# Altium PCB CFS210017030ZZP2005A0.PcbDoc
Units mil, origin at the board's own origin, x right, y up, seen from the top; angles counter-clockwise.
Board outline 1651.73 x 737.32 mil, 4 copper layers (Top Layer, GND, VCC, Bottom Layer); 92 components, 60 nets, 274 pads, 86 vias.
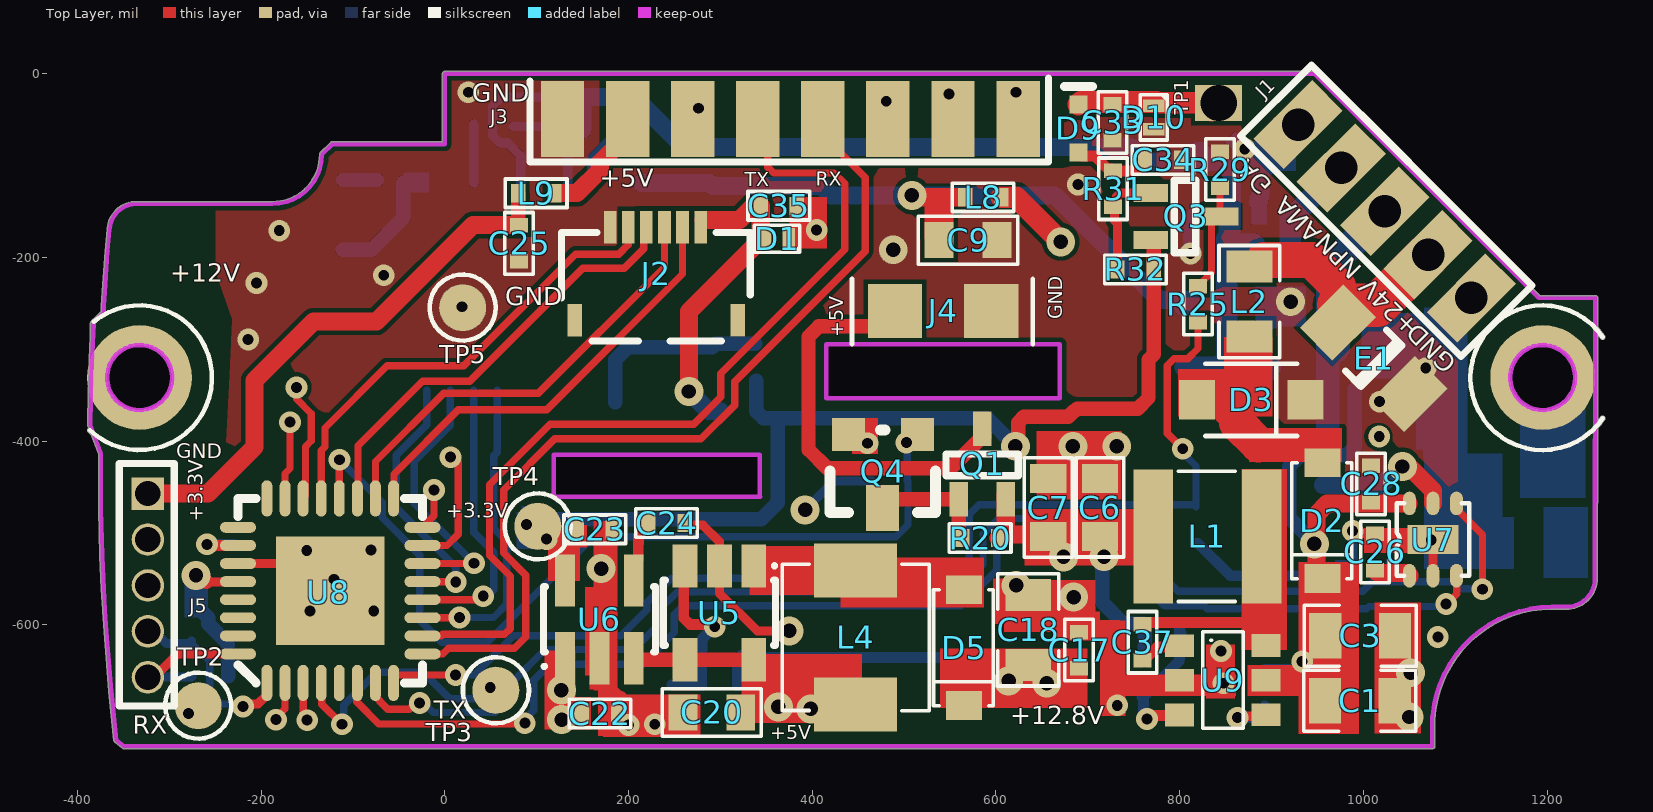
[diagram p0: Top Layer view]
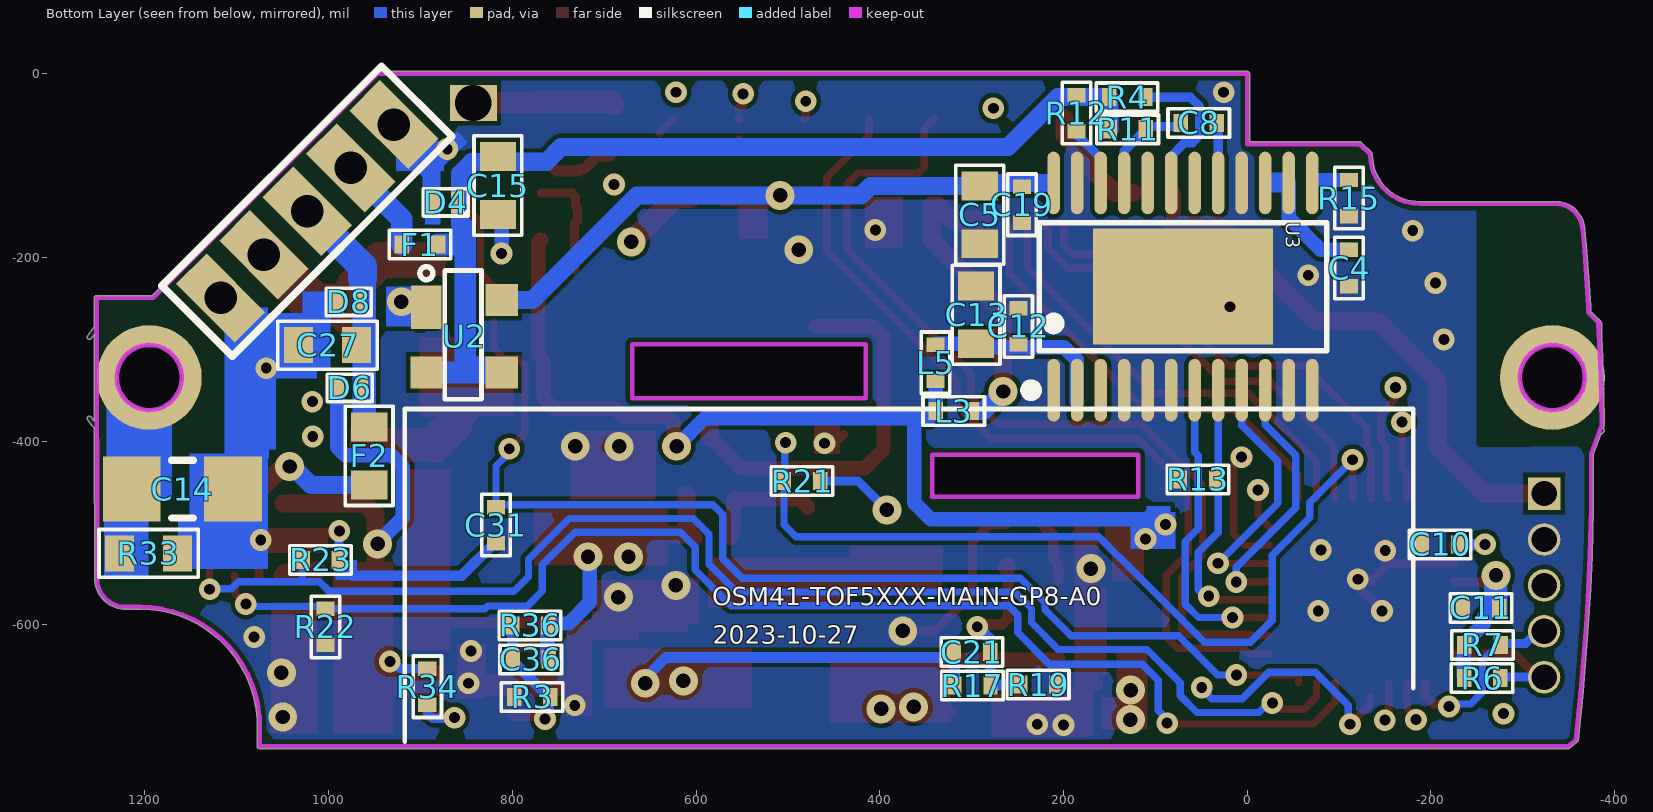
[diagram p1: Bottom Layer view, seen from below]
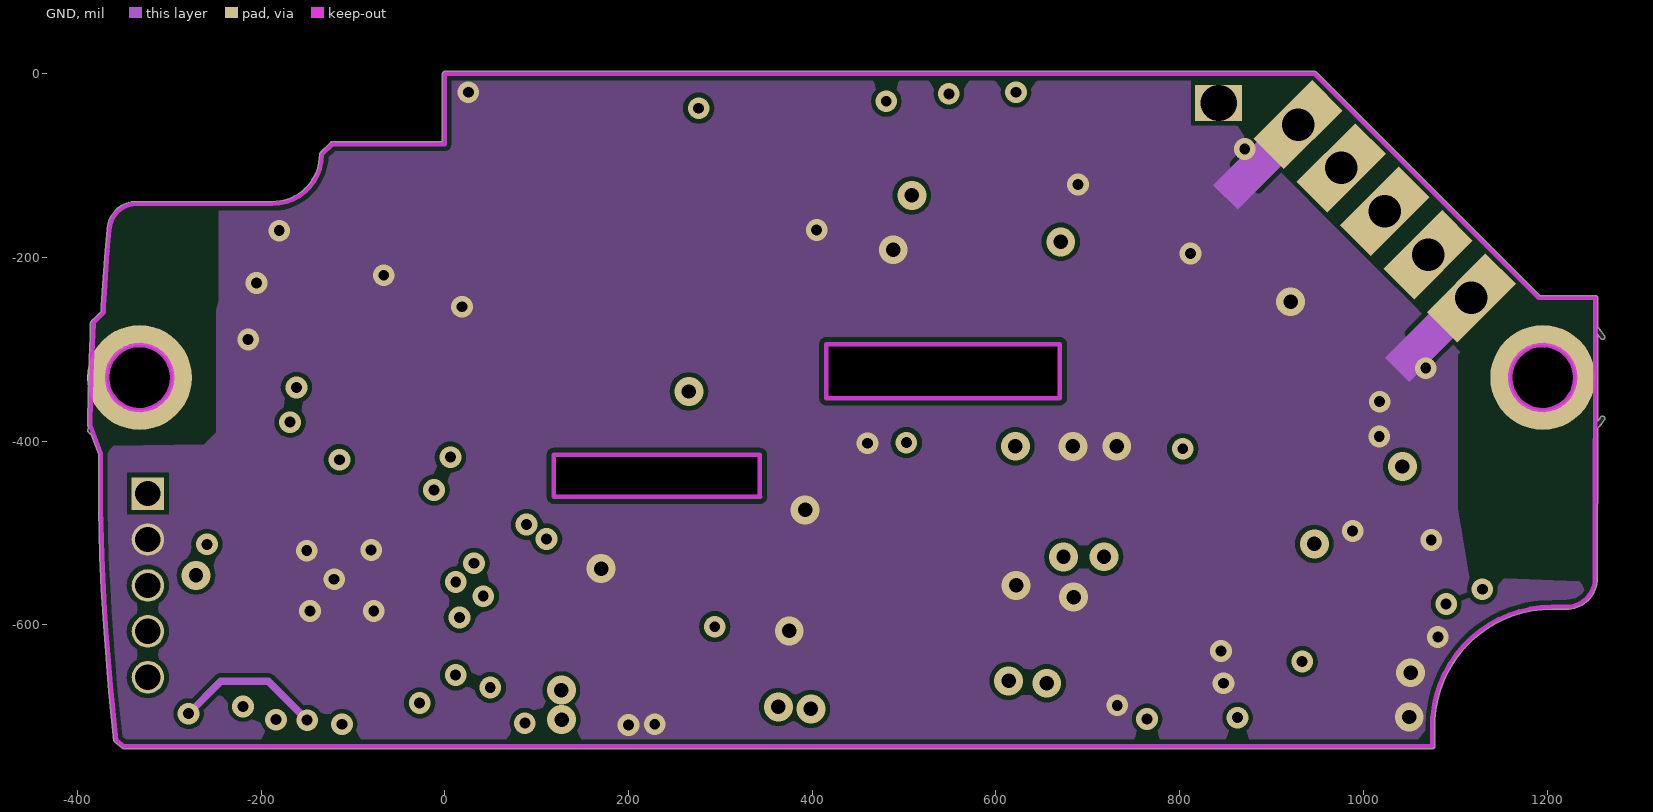
[diagram p2: GND]
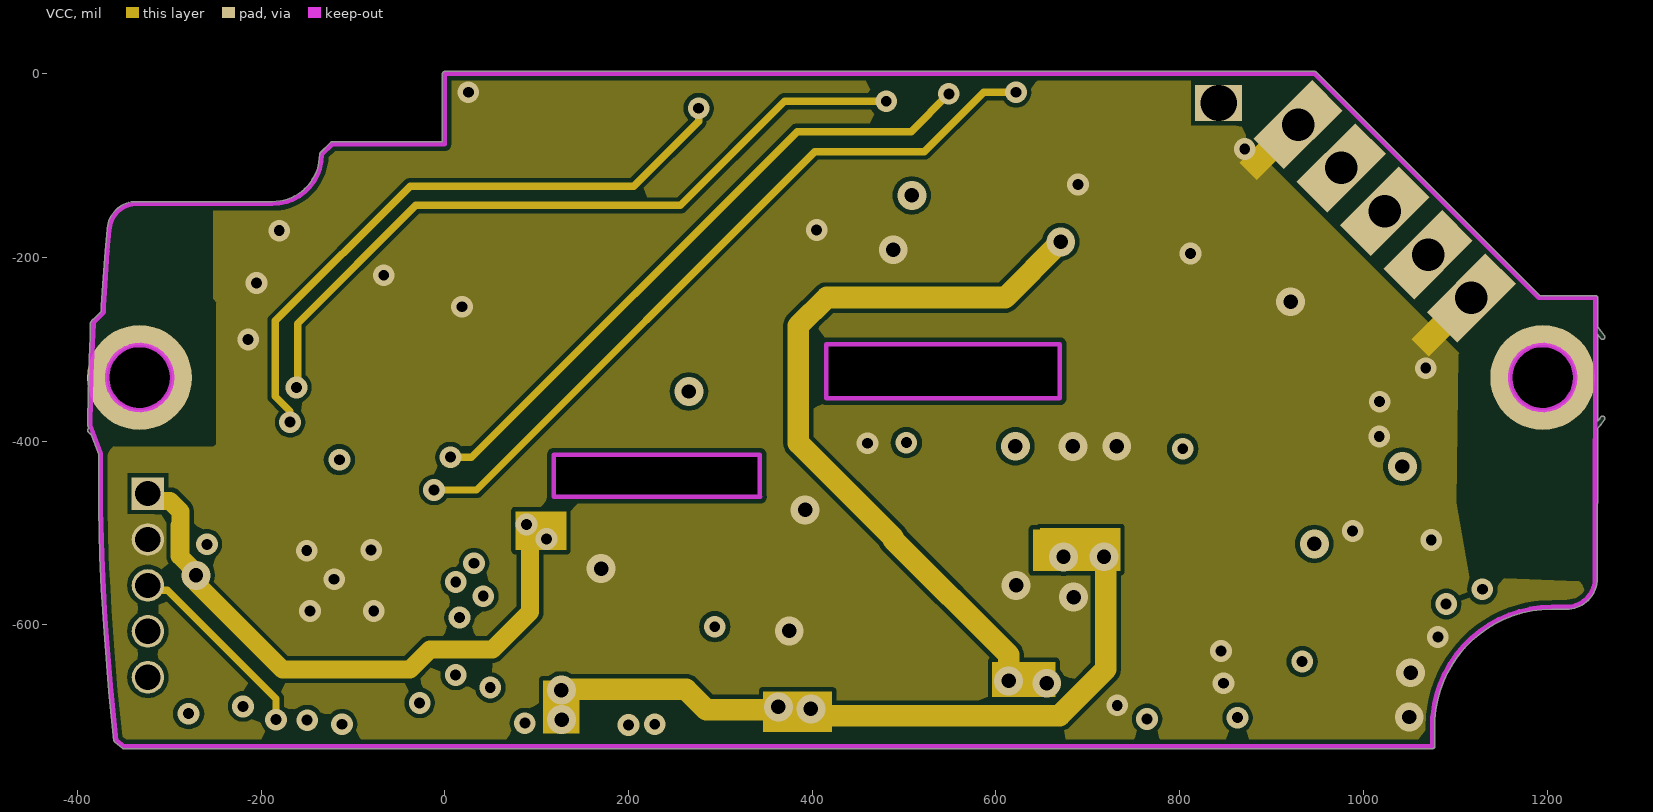
[diagram p3: VCC]
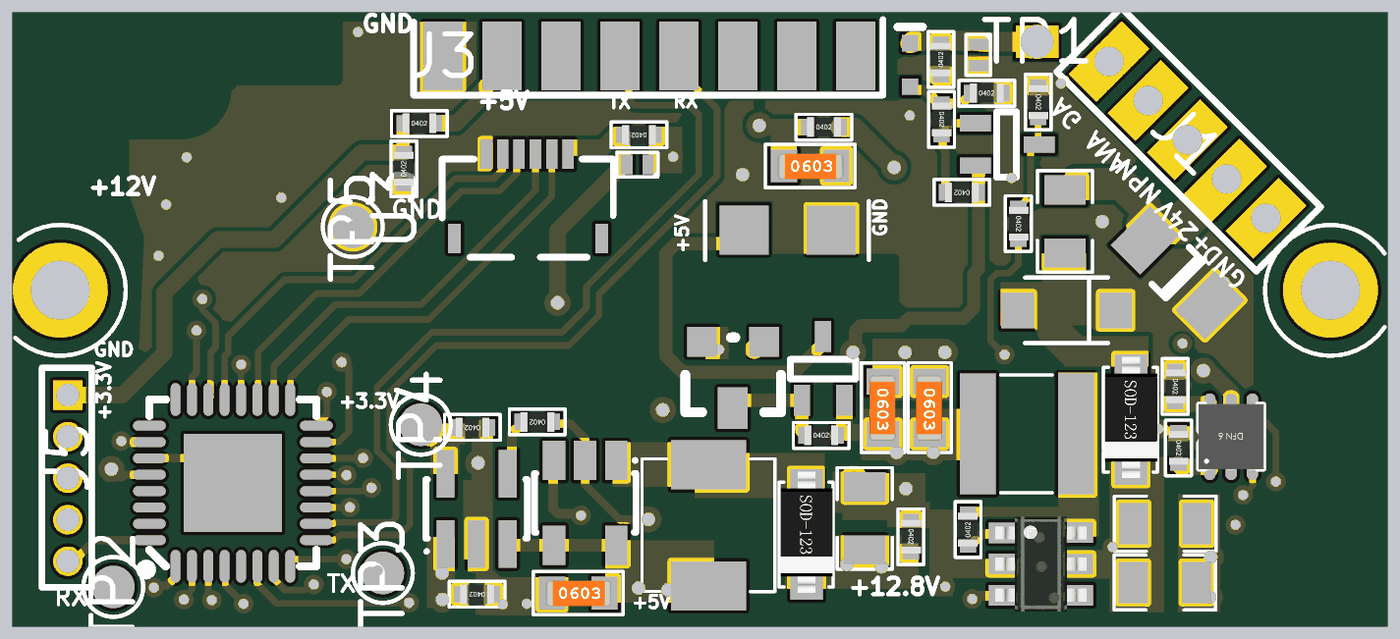
[diagram p4: 3D render of the assembled board from above, using the file's embedded part models]
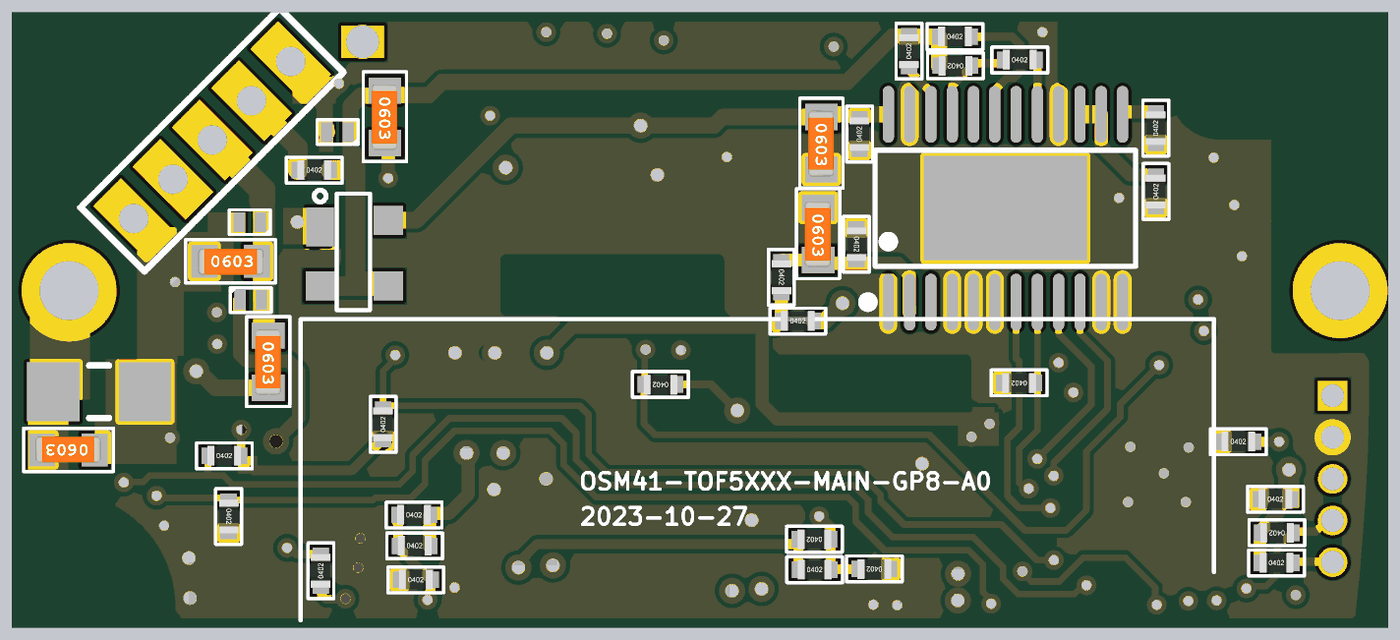
[diagram p5: 3D render of the assembled board from below, using the file's embedded part models]

## Layer stack, top to bottom
Top Solder: solder mask 0.4, Solder Resist, Dk 3.5
Top Layer: signal copper 1.4
Dielectric1: core 12.6, FR-4, Dk 4.8
GND: signal copper 1.4
Dielectric2: prepreg 12.6, FR-4, Dk 4.8
VCC: signal copper 1.4
Dielectric3: core 12.6, FR-4, Dk 4.8
Bottom Layer: signal copper 1.4
Bottom Solder: solder mask 0.4, Solder Resist, Dk 3.5

## Board outline
-375.65,-524.89 cw(c-373.13,-524.78) -375.65,-524.85 -375.65,-524.84 -376.92,-474.3 -376.92,-474.29 ccw(c-374.4,-474.23) -376.92,-474.3 -376.92,-474.29 cw(c-374.4,-474.23) -376.92,-474.23 -376.86,-414.24 -384.8,-392.87 cw(c-332.22,-330.92) -387.98,-390.02 cw(c-386.26,-388.19) -387.38,-385.94 -388.15,-383.87 cw(c-386.23,-382.25) -388.74,-382.22 cw(c2338.13,-420.35) -388.73,-381.8 cw(c2338.13,-420.35) -388.29,-357.94 cw(c-385.78,-357.99) -388.29,-357.92 cw(c2338.13,-420.35) -387.64,-334.07 cw(c-385.13,-334.13) -387.64,-334.06 cw(c-385.13,-334.13) -387.64,-334.04 cw(c2338.13,-420.35) -386.78,-310.2 cw(c-384.27,-310.29) -386.78,-310.19 cw(c-384.27,-310.29) -386.78,-310.18 cw(c2338.13,-420.35) -385.72,-286.39 -385.72,-271.59 cw(c-383.2,-271.59) -384.98,-269.81 -384.74,-269.57 cw(c-382.3,-270.16) -383.89,-268.22 cw(c-332.22,-330.92) -381.44,-266.27 -373.79,-258.62 -373.79,-253.23 cw(c-371.27,-253.23) -373.78,-253.07 -373.78,-253.06 -372.31,-229.44 cw(c-369.8,-229.59) -372.31,-229.42 -372.31,-229.43 cw(c-369.8,-229.59) -372.31,-229.4 -369.72,-193.09 cw(c-367.21,-193.25) -369.72,-193.03 -369.72,-193.01 -367.61,-169.26 cw(c-365.1,-169.48) -367.44,-168.55 cw(c-364.93,-168.38) -367.43,-168.14 cw(c-335.53,-171.12) -335.53,-139.08 cw(c-335.53,-141.59) -334.67,-139.23 -187.73,-139.23 ccw(c-187.73,-87.74) -136.24,-87.74 cw(c-133.73,-87.74) -135.51,-85.96 -124.4,-74.85 cw(c-122.62,-76.63) -122.62,-74.11 -2.52,-74.11 -2.52,0 cw(c0,0) 0,2.51 947,2.51 cw(c947,0) 948.78,1.78 1192.08,-241.53 1252.76,-241.53 cw(c1252.76,-244.04) 1255.27,-244.04 cw(c1252.76,-244.04) 1255.27,-244.05 1255.21,-275.99 cw(c1195.34,-330.92) 1262.52,-285.22 cw(c1260.44,-286.63) 1262.96,-286.63 cw(c1260.44,-286.63) 1258.36,-288.05 ccw(c1195.34,-330.92) 1255.19,-283.72 1255,-378.37 ccw(c1195.34,-330.92) 1258.36,-373.8 cw(c1260.44,-375.21) 1262.96,-375.21 cw(c1260.44,-375.21) 1262.52,-376.63 cw(c1195.34,-330.92) 1254.98,-386.11 1254.65,-549.58 cw(c1221.25,-549.57) 1221.26,-582.97 1221.25,-582.97 ccw(c1221.25,-549.57) 1221.26,-582.97 1221.25,-582.97 1205.52,-582.97 cw(c1205.04,-580.5) 1205.04,-583.01 ccw(c1205.04,-710.42) 1077.86,-702.72 1077.81,-732.3 ccw(c1075.3,-732.29) 1077.81,-732.29 1077.81,-732.3 cw(c1075.3,-732.29) 1075.3,-734.81 -349.39,-734.81 cw(c-349.39,-732.29) -350.97,-734.25 -350.96,-734.25 cw(c-349.39,-732.29) -350.97,-734.24 -350.97,-734.25 -350.97,-734.24 -359.18,-727.61 cw(c-357.6,-725.65) -359.19,-727.61 -359.18,-727.61 cw(c-357.6,-725.65) -360.1,-725.92 -365.77,-672.47 cw(c-363.27,-672.2) -365.78,-672.4 -370.84,-607.9 cw(c-368.33,-607.7) -370.84,-607.87 -372.48,-584.31 cw(c-369.97,-584.13) -372.48,-584.28 -372.48,-584.29 cw(c-369.97,-584.13) -372.48,-584.28 -373.91,-560.71 cw(c-371.4,-560.55) -373.91,-560.69 -373.91,-560.7 cw(c-371.4,-560.55) -373.91,-560.68 -375.13,-537.08 cw(c-372.61,-536.95) -375.13,-537.05 -375.13,-537.06 cw(c-372.61,-536.95) -375.13,-537.05
cut-out: 118.7,-461.63 342.61,-461.63 342.61,-414.75 118.7,-414.75
cut-out: 669.68,-353.39 415.41,-353.39 415.41,-294.34 669.68,-294.34

## Design rules (kind name [scope] priority, off if disabled: settings)
Clearance [InPoly] p1: gap=5
ComponentClearance [(InComponent('J2'))] p1: gap=3.94 collisioncheckmode=3 verticalgap=3.94 showdistances=FALSE
ComponentClearance ComponentClearance_1 [All] p2: gap=0.04 collisioncheckmode=3 verticalgap=0.04 showdistances=FALSE
FabricationTestPointUsage TestPointUsage [All] p1: valid=0 allowmultiple=FALSE
FabricationTestpoint Testpoint [(IsPad And (OnTopLayer Or OnBottomLayer))] p1: side=3 testpointundercomponent=TRUE minsize=40 maxsize=100 preferedsize=60 minholesize=0 maxholesize=40 preferedholesize=32 testpointgrid=1 allowsidetop=TRUE allowsidebottom=TRUE usegrid=TRUE gridtolerance=0.01
HoleToHoleClearance [All] p1: gap=5.98 allowstackedmicrovias=TRUE
MinimumSolderMaskSliver [All] p1: minsoldermaskwidth=5.98
PlaneConnect [All] p1: planeconnectstyle=Direct reliefexpansion=20 reliefentries=4 reliefconductorwidth=10 reliefairgap=10
PolygonConnect PolygonConnect_1 [ISVIA] p1: connectstyle=Direct reliefconductorwidth=10 reliefentries=4 polygonreliefangle="90 Angle" airgapwidth=10
PolygonConnect [All] p2: connectstyle=Direct reliefconductorwidth=10 reliefentries=4 polygonreliefangle="90 Angle" airgapwidth=10
RoutingVias [All] p1: holewidth=11.81 width=31.5 viastyle="Through Hole" minholewidth=6 minwidth=10 maxholewidth=39.37 maxwidth=50
SilkToSilkClearance [All] p1: silktosilkclearance=5.98
SilkToSolderMaskClearance SilkscreenOverComponentPads [IsPad] p1: minsilkscreentomaskgap=10 clearancetoexposedcopper=TRUE
SolderMaskExpansion [All] p1: expansion=4
Width [All] p1: maxlimit=78.74 minlimit=5 preferedwidth=9.84
22 further rules are at their usual default settings.

## Components (designator, comment, footprint, x,y, rotation, side; value= is the part's Value field where it differs from the comment)
C1 "Q0402C50V223K01" R0805-Z 996.16,-682.57 r180 top
C3 "Q0402C50V223K01" R0805-Z 996.63,-611.79 r180 top
C4 "0.1UF" R0402-Z -110.92,-211.52 r90 bottom
C5 "25V 10uF 20% X5R 0603" R0603-Z 291.16,-153.58 r90 bottom
C6 "Q0603C16V106K01" R0603-Z 713.32,-472.21 r90 top
C7 "Q0402C50V223K01" R0603-Z 657.06,-472.29 r90 top
C8 "3.9NF/50V/10%" R0402-Z 52.76,-53.44 r180 bottom
C9 "2.2uF,0603,50v" R0603-Z 569.7,-181.15 r180 top
C10 "Cap Semi" R0402-Z -209.92,-512.33 r180 bottom
C11 "Cap Semi" R0402-Z -254.46,-581.47 r180 bottom
C12 "X7R 0402 100N 10% 25V" R0402-Z 249.2,-275.04 r270 bottom
C13 "16V 10uF 20% X5R 0603" R0603-Z 295.1,-262.45 r90 bottom
C14 "1nF 2KV" CR3216-1206 1159.28,-452.22 r0 bottom
C15 "1uF/50V 0603" R0603-Z 815.75,-121.78 r90 bottom
C17 "Q0402C50V223K01" R0402-Z 690.69,-627.52 r270 top
C18 "10uF,0805,50v" R0805-Z 635.25,-605.55 r90 top
C19 "X7R 0402 100N 10% 25V" R0402-Z 245.38,-142.56 r90 bottom
C20 "Q0402C50V223K01" R0603-Z 290.71,-695.27 r180 top
C21 "150PF/50V //330PF" R0402-Z 299.7,-629.52 r0 bottom
C22 "Q0402C50V223K01" R0402-Z 168.98,-696.69 r180 top
C23 "Q0402C50V223K01" R0402-Z 163.31,-495.96 r180 top
C24 "Q0402C50V223K01" R0402-Z 241.44,-489.26 r180 top
C25 "Cap Semi" R0402-Z 80.93,-184.55 r90 top
C26 "100nF/10V,0402" R0402-Z 1012.59,-520.63 r270 top
C27 "1nF/50V,0603" R0603-Z 1001.18,-295.41 r0 bottom
C28 "0.1uF/50V 0402" R0402-Z 1008.56,-446.62 r270 top
C31 "100nF/10V,0402" R0402-Z 817.86,-491.37 r90 bottom
C33 "Q0402C50V223K01" R0402-Z 726.82,-52.93 r90 top
C34 "1uF,0402,10v" R0402-Z 782.01,-93.66 r0 top
C35 "Q0402C50V223K01" R0402-Z 363.65,-143.78 r180 top
C36 "Q0402C50V223K01" R0402-Z 779.94,-637.45 r180 bottom
C37 "Q0402C50V223K01" R0402-Z 759.5,-618.82 r90 top
D1 "WE05DUCF-B" WS36DF 361.85,-179.62 r90 top
D2 "RBR1MM60ATR" SOD-123Z 956.59,-489.3 r90 top
D3 "SJD12C33L01" SOD-123S 878,-355 r0 top
D4 "WS36DF/SJD12C33L01" WS36DF 872.64,-140.1 r90 bottom
D5 "RBR1MM60ATR" SOD-123Z 566.46,-627.57 r90 top
D6 "WS36DF/SJD12C33L01" WS36DF 977.02,-342.04 r270 bottom
D8 "WS36DF/SJD12C33L01" WS36DF 978.09,-248.43 r90 bottom
D9 "NSR0230M2T5G" SOD723 689.8,-59.56 r270 top
D10 "WS36DF/SJD12C33L01" WS36DF 771.88,-47.57 r180 top
E1 "PV321611G380/330PKT" FPV3216 1011.25,-309.64 r135 top
F1 "热敏电阻 PRG15BC330MM1RC 0402" R0402-Z 900.6,-185.89 r180 bottom
F2 "磁珠/1A UPZ1608U601-1R3TF" R0603-Z 955.91,-416.13 r90 bottom
J1 "CON5" CON1.695-5 1023.32,-149.72 r315 top locked
J2 "6P-0.5MM" FPC-0.5-6 230.32,-217.72 r180 top locked
J3 "CON8" CON8-QIAOJIE 128.15,-49.02 r0 top locked
J4 "CON2" JIGUANGQIAO 542.54,-258.28 r0 top
J5 "CON5" PH1.27-5 -323.19,-532.03 r90 top
L1 "WPN4012H220MT" WPN4012H220MT 830.26,-503.72 r180 top
L2 "PRG21BC4R7MM1RK 0805" R0805-Z 876,-248 r270 top
L3 "300MA磁珠" R0402-Z 319.44,-367.25 r180 bottom
L4 "10UH或12UH/1..3A以上" MD4012-100M 447.32,-613.72 r90 top
L5 "300MA磁珠" R0402-Z 339.33,-314.64 r270 bottom
L8 "300MA磁珠" R0402-Z 586.14,-134.46 r0 top
L9 "300MA磁珠" R0402-Z 99.59,-130.09 r0 top
Q1 "RTU002P02" SOT-323 585.11,-461.22 r0 top
Q3 "RTU002P02" SOT-323 770.36,-155.36 r270 top
Q4 "RK7002BMT116" SOT-23 514.45,-392.65 r180 top
R3 "Res2" R0402-Z 778.52,-678.33 r180 bottom
R4 "15R 1%" R0402-Z 130.69,-25.5 r180 bottom
R6 "Res3" R0402-Z -255.79,-657.93 r180 bottom
R7 "Res3" R0402-Z -256.19,-621.76 r0 bottom
R11 "68R 1%" R0402-Z 130.13,-60.44 r0 bottom
R12 "68R 1%" R0402-Z 185.91,-42.84 r90 bottom
R13 "10K 1%" R0402-Z 53.65,-441.6 r0 bottom
R15 "15K 1%" R0402-Z -110.69,-135.33 r90 bottom
R17 "150K/1%" R0402-Z 299.18,-666.13 r180 bottom
R19 "16K/1%" R0402-Z 227.63,-665.1 r0 bottom
R20 "Res2" R0402-Z 582.93,-505.5 r0 top
R21 "Res2" R0402-Z 484.69,-443.5 r0 bottom
R22 "Res3" R0402-Z 1003.57,-602.16 r270 bottom
R23 "Res3" R0402-Z 1008.71,-529.27 r180 bottom
R25 "1K,1%,0402" R0402-Z 819.98,-250.78 r270 top
R29 "27K,1%,0402" R0402-Z 843.93,-104.37 r270 top
R31 "2K" R0402-Z 727.59,-125.24 r270 top
R32 "Res2" R0402-Z 751.96,-212.95 r180 top
R33 "1M/0603" R0603-Z 1196.16,-522.21 r180 bottom
R34 "Res2" R0402-Z 892.68,-667.32 r90 bottom
R36 "Res2" R0402-Z 780.72,-600.45 r180 bottom
TP1 "TESTPOINT" TP1-1 842.54,-31.72 r180 top
TP2 "TP" TP1 -268.49,-687.91 r90 top locked
TP3 "TP" TP1 55.68,-671.16 r90 top locked
TP4 "TP" TP1 101.32,-492.72 r90 top locked
TP5 "TP" TP1 19.5,-254.56 r90 top locked
U2 "BV-SR70" CD143A 852.65,-285.69 r270 bottom
U3 "AD5412AREZ-REEL7" AD5422 70.01,-231.7 r90 bottom locked
U5 "TPS61041/SGM6601YTN5G/TR/LMR62014DBV" SOT23-5-LMR62014 298.98,-586.82 r180 top
U6 "CE6301B33M/SGM2036-3.3YN5G/TR" SOT23-5 168.39,-593.98 r0 top
U7 "IC-DX,DFN6" IC-DX 1075.82,-507.1 r90 top
U8 "FM33LC0x3N" QFN32 -126.65,-564.69 r0 top locked
U9 "SGM61410" SOT23-6-Z 847.03,-660.34 r0 top

## Footprints (in the part's own frame and the unit in brackets; to place one, negate y for a bottom-side part, rotate by r counter-clockwise, add the part's x,y. Pads: shape width x height; smd on the part's side, far side on the other; paste and mask are expansions set on the pad)
AD5422 [mm]
  oval 1.731x0.343 smd: 1(-2.866,3.575) 2(-2.866,2.925) 3(-2.866,2.275) 4(-2.866,1.625) 5(-2.866,0.975) 6(-2.866,0.325) 7(-2.866,-0.325) 8(-2.866,-0.975) 9(-2.866,-1.625) 10(-2.866,-2.275) 11(-2.866,-2.925) 12(-2.866,-3.575) 13(2.866,-3.575) 14(2.866,-2.925) 15(2.866,-2.275) 16(2.866,-1.625) 17(2.866,-0.975) 18(2.866,-0.325) 19(2.866,0.325) 20(2.866,0.975) 21(2.866,1.625) 22(2.866,2.275) 23(2.866,2.925) 24(2.866,3.575)
  rect 3.2x4.985 smd: 25(0,0)
  silkscreen extent -3.02,-3.98 1.77,4.35
CD143A [mil]
  rect 47x33 smd: 1(-31.5,-41)
  rect 35x35 smd: 2(39.5,-41) 3(39.5,41) 4(-39.5,41)
  silkscreen extent -76,-48 69,19
CON1.695-5 [mm]
  rect 1.2x2.3 hole 0.9: 1(-3.39,0) 2(-1.695,0) 3(0,0) 4(1.695,0) 5(3.39,0)
  silkscreen extent -4.29,-1.35 4.33,1.43
CON8-QIAOJIE [mm]
  rect 1.2x2.1 smd: 1(0,0) 2(1.8,0) 3(3.6,0) 4(5.4,0) 5(7.2,0) 6(9,0) 7(10.8,0) 8(12.6,0)
  silkscreen extent -0.9,-1.19 13.44,1.12
CR3216-1206 [mm] "Chip Resistor; Body 3.2 x 1.6 mm (LxW typ)"
  rect 1.6x1.8 smd: 1(-1.4,0) 2(1.4,0)
  silkscreen extent -0.3,-0.8 0.3,0.8
FPC-0.5-6 [mm]
  rect 0.35x0.9 smd: 1(-1.225,-1.287) 2(-0.725,-1.287) 3(-0.225,-1.287) 4(0.275,-1.287) 5(0.775,-1.287) 6(1.275,-1.287)
  rect 0.4x0.9 smd: A1(-2.25,1.287) A2(2.25,1.288)
  silkscreen extent -2.6,-1.14 2.63,1.86
FPV3216 [mm]
  rect 1.28x1.7 smd: 1(-1.4,0) 2(1.4,0)
  silkscreen extent -0.3,-0.8 0.3,0.8
IC-DX [mm]
  oval 0.65x0.35 smd: 1(-1,0.65) 2(-1,0) 3(-1,-0.65) 4(1,-0.65) 5(1,0) 6(1,0.65)
  rect 0.8x1.4 smd: 7(0,0)
  silkscreen extent -1,-1 1,1, body extent -1,-1 1,1, height 0.75
JIGUANGQIAO [mm]
  rect 1.5x1.5 smd: 1(1.334,0) 2(-1.333,0)
MD4012-100M [mm]
  rect 1.5x2.3 smd: 1(-1.85,0) 2(1.85,0)
  silkscreen extent -2.03,-2.03 2.03,2.03
PH1.27-5 [mm]
  rect 0.9x0.9 hole 0.7: 1(1.905,0)
  round 0.9 hole 0.7: 2(0.635,0) 3(-0.635,0) 4(-1.905,0) 5(-3.175,0)
  silkscreen extent -3.97,-0.73 2.73,0.79
QFN32 [mm]
  round 0.6 on Top Overlay: 0(-2.6,-2.6)
  rect 3x3 smd: 0(0.05,0.05)
  oval 0.3x1 smd: 1(-1.7,-2.5) 2(-1.2,-2.5) 3(-0.7,-2.5) 4(-0.2,-2.5) 5(0.3,-2.5) 6(0.8,-2.5) 7(1.3,-2.5) 8(1.8,-2.5) 17(1.8,2.6) 18(1.3,2.6) 19(0.8,2.6) 20(0.3,2.6) 21(-0.2,2.6) 22(-0.7,2.6) 23(-1.2,2.6) 24(-1.7,2.6)
  oval 1x0.3 smd: 9(2.6,-1.7) 10(2.6,-1.2) 11(2.6,-0.7) 12(2.6,-0.2) 13(2.6,0.3) 14(2.6,0.8) 15(2.6,1.3) 16(2.6,1.8) 25(-2.5,1.8) 26(-2.5,1.3) 27(-2.5,0.8) 28(-2.5,0.3) 29(-2.5,-0.2) 30(-2.5,-0.7) 31(-2.5,-1.2) 32(-2.5,-1.7)
  silkscreen extent -2.5,-2.5 2.6,2.6
R0402-Z [mm]
  rect 0.4x0.5 smd: 1(-0.5,0) 2(0.5,0)
  silkscreen extent -0.85,-0.39 0.85,0.39, body extent -0.52,-0.29 0.52,0.31, height 0.34
R0603-Z [mm]
  rect 0.8x1 smd: 1(0.8,0) 2(-0.8,0)
  silkscreen extent -1.37,-0.66 1.37,0.66, body extent -1.01,-0.38 0.99,0.41, height 0.79
R0805-Z [mil]
  rect 35x50 smd: 1(-38,0) 2(38,0)
  silkscreen extent -61,-33 61,33
SOD723 [mm]
  rect 0.5x0.5 smd: 1(0.662,0) 2(-0.662,0)
  silkscreen extent -1.16,-0.38 -1.16,0.38
SOD-123S [mm]
  rect 1x1.1 smd: 1(-1.5,0) 2(1.5,0)
  silkscreen extent -1.27,-1 1.27,1
SOD-123Z [mm]
  rect 0.8x1 smd: 1(1.672,0.029) 2(-1.528,0.029)
  silkscreen extent -1.53,-0.78 1.67,0.87, body extent -1.71,-0.77 1.99,0.83, height 1.2
SOT23-5 [mm] "SOT-23/SC-74A; 5 Leads; Body 3 x 3 mm, inc. leads (LxW max)"
  rect 0.55x1.45 smd: 1(-0.95,-1.075) 2(0,-1.075) 3(0.95,-1.075) 4(0.95,1.075) 5(-0.95,1.075)
  silkscreen extent -1.57,-1.35 1.55,0.9
SOT23-5-LMR62014 [mm]
  rect 0.69x1.2 smd: 1(-0.95,-1.295) 2(0,-1.295) 3(0.95,-1.295) 4(0.95,1.295) 5(-0.95,1.295)
  silkscreen extent -1.57,-1.35 1.55,0.9
SOT23-6-Z [mm]
  rect 0.8x0.63 smd: 1(-1.195,0.953) 2(-1.195,0.003) 3(-1.195,-0.96) 4(1.195,-0.953) 5(1.195,0) 6(1.195,0.96)
  silkscreen extent -0.56,-1.33 0.56,1.34, body extent -1.4,-1.45 1.4,1.45, height 1.45
SOT-23 [mil]
  rect 36x36 smd: 1(0,0) 2(75,0)
  rect 36x50 smd: 3(38,80)
  silkscreen extent -20,-5 95,85
SOT-323 [mm]
  rect 0.5x0.95 smd: 1(-0.65,-0.05) 2(0.65,-0.05) 3(0,1.9)
  silkscreen extent -1,0.6 1,1.2
TP1 [mm]
  round 1.3 smd: 0(0,0)
  silkscreen extent -0.91,-0.91 0.91,0.91
TP1-1 [mm]
  rect 1.3x1 hole 1: 1(0,0)
WPN4012H220MT [mm]
  rect 1.1x3.7 smd: 1(-1.5,0) 2(1.5,0)
  silkscreen extent -0.77,-1.8 0.8,1.8
WS36DF [mm]
  rect 0.6x0.35 smd: 1(0,-0.325) 2(0,0.325)
  silkscreen extent -0.37,-0.62 0.38,0.63

## Part data
C1 C3 C6 C7 C14 C17 C20 C22 C23 C24 C26 C27 C28 C31 C33 C35 C36 C37: library part Cap, "Capacitor"
C4 C5 C8 C9 C12 C13 C18 C19 C21 C34: library part CAP, "Capacitor"
C10 C11 C25: "Capacitor (Semiconductor SIM Model)"
C15: library part Cap
D1 D3 D4 D6 D8 D10: library part PSD36C
D2 D5: library part Diode, "Default Diode"
D9: library part DIODE, "Diode"
E1: library part VARISTOR, "PV321611G380PKT"
F1 F2: library part PTC, "自恢复保险"
J1 J3 J4 J5: "Connector"
J2: library part 6PIN_1
L1: library part Inductor, "Inductor"
L2 L3 L5 L8 L9: library part INDUCTOR1
L4: library part INDUCTOR
Q1 Q3: library part PMOS-2, "P-Channel Power MOSFET"
Q4: library part MOSFET-N, "N-Channel MOSFET"
R3 R6 R7 R20 R21 R22 R23 R32 R34 R36: "Resistor"
R4 R11 R12 R13 R15 R17 R19 R25 R29 R31 R33: library part RES1
U2: library part CD143A
U5: library part TPS61041
U6: library part SGM2036-3.3YN5G/TR
U7: library part IC-DX
U9: library part HM2459B

## Free pads (board coordinates)
  round 114.17 hole 70.87: 0(-332.24,-330.72) 1(1195.32,-330.72)

## Via types
v1: diameter 23.62, hole 11.81, Top Layer to Bottom Layer, tented both sides, 60 vias
v2: diameter 31.5, hole 15.75, Top Layer to Bottom Layer, tented both sides, 26 vias

## Nets (pads, with @x,y where several pads share a name; then routed paths per layer and width w, separated by ;. In a path a pad name is that pad's centre, name@x,y a point inside that pad or via, vN(x,y) a via of type N, cw(c..) or ccw(c..) an arc to the next point about the centre after c; other vN are vias at no path point)
+12.79V: C17.2 C18.1 C21.2 D5.2 L8.2 R17.1 | length 1362.8
  Top Layer w9.84: v2(613.86,-661) 615.18,-659.68 615.18,-656.13 620.04,-656.13 632.62,-643.55 C18.1 C18.1@635.25,-656.33 ; C18.1@619.45,-658.13 649.95,-658.13 v2(655.38,-663.55)
  Top Layer w23.62: L8.2 622.14,-134.46 v2(670.61,-182.94)
  VCC w23.62: v2@607.79,-652.11 v2@613.86,-658.18 ; v2(613.86,-661) v2@613.86,-658.18 ; v2(670.61,-182.94) 609.94,-243.61 415.85,-243.61 384.93,-274.53 384.93,-401.97 488.24,-505.28 488.24,-507.14 613.86,-632.76 v2@613.86,-658.18
  Bottom Layer w11.81: R17.1 318.87,-637.39 322.8,-633.45 324.72,-635.37 633,-635.37 645.51,-647.88 645.51,-648.36 655.38,-658.22 v2(655.38,-663.55)
+12V: C5.1 C9.1 C19.2 L8.1 U2.4 U3.24 | length 661.1
  Bottom Layer w19.68: U3.24@214.14,-118.87 287.94,-118.87 C5.1 409.92,-122.09 420.29,-132.46 v2(508.44,-132.46) 664.53,-132.46 778.26,-246.19 U2.4 U2.4@803.99,-253.85
DV5V/0.5A: C6.2 C7.2 C20.2 C22.2 C36.2 L1.2 L4.1 Q1.2 R20.2 R36.2 U5.4 U5.5 U6.1 U6.3 | length 1358.7
  Top Layer w9.84: v2@122.8,-707.59 v2(127.3,-703.09) ; C20.2 348.21,-669.27 363.36,-669.27 ; v2(363.09,-689.27) 373.57,-678.79 388.19,-678.79 ; v2@396,-689.33 398.19,-691.53 v2(398.58,-691.53) ; C6.2@703.69,-509.61 707.76,-513.68 716.84,-513.68 717.69,-514.54 v2(717.69,-525.83) ; C6.2@708.91,-512.54 716.94,-504.5 C6.2@718.41,-504.5
  Top Layer w15.75: U6.3 207.3,-637.8 U5.4 U5.5 ; C7.2@660.03,-501.81 C7.2@660.22,-502 ; C7.2@662.01,-503.78 C7.2@660.22,-502 ; C7.2@663.22,-502 C7.2@660.22,-502
  Top Layer w19.68: R20.2 610.7,-497.42 ; Q1.2@610.7,-457.96 Q1.2 610.7,-497.42 ; C7.2@655.09,-501.81 610.7,-501.81 610.7,-497.42
  VCC w9.84: v2@126.87,-689.45 126.95,-689.37 v2(126.95,-671.03)
  VCC w19.68: 657.84,-518.1 657.84,-504.56 668.65,-515.37 v2@668.65,-526.05
  VCC w23.62: v2@122.22,-670.16 262.6,-670.16 284.74,-692.3 360.07,-692.3 v2(363.09,-689.27) ; v2@396,-689.33 405.43,-698.77 669.15,-698.77 719.56,-648.36 719.56,-529.67 v2@707.99,-518.1 ; v2@683.81,-523.42 690.06,-529.67 ; 691.72,-518.1 v2@707.99,-518.1 ; v2(717.69,-525.83) 717.69,-524.55 711.24,-518.1 v2@707.99,-518.1
  VCC w31.5: v2@126.87,-689.45 126.87,-702.66 v2(127.3,-703.09)
  Bottom Layer w15.75: v2(717.69,-525.83) 715.64,-527.87 715.64,-575.37 738.75,-598.48 761.03,-598.48 R36.2 ; C36.2@761.84,-638.5 761.97,-638.38 R36.2@761.97,-600.45
  other v2: 673.59,-526.05
GND: C1.1 C3.1 C4.1 C5.2 C6.1 C7.1 C9.2 C10.1 C11.1 C12.1 C13.1 C14.1 C15.2 C17.1 C18.2 C19.1 C20.1 C22.1 C23.1 C24.1 C25.1 C26.1 C27.1 C28.1 C31.1 C33.1 C34.2 C35.1 D1.1 D3.2 D4.2 D8.2 D10.2 E1.1 J1.1 J1.5 J2.6 J3.1 J4.1 J5.2 Q4.2 R3.1 R13.2 R15.1 R19.1 R21.1 R22.2 R23.2 R29.1 R33.1 TP5.0 U2.1 U3.1 U3.4 U3.5 U3.6 U3.11 U3.12 U3.16 U3.23 U3.25 U5.2 U6.2 U7.2 U7.7 U8.0@-124.68,-562.72 U8.27 U9.2 | length 1446.6
  Top Layer w9.84: U8.0@-150.18,-537.22 v1(-150.18,-519.14) ; v1(-146.76,-584.79) -120.42,-558.45 v1(-120.42,-550.3) ; v2(170.32,-538.72) 178.72,-547.12 178.72,-604.38 ; 177.82,-603.67 177.82,-626.88 U6.2 174.3,-642.21 174.3,-661.16 190,-676.85 191.89,-676.85 196.83,-681.79 196.83,-685.34 ; 182.1,-507.46 182.1,-505.49 185.06,-502.54 C23.1@185.06,-500.57 ; v1(200.05,-708.92) 211.65,-708.92 v1@220.77,-699.79 ; v1(228.67,-708.14) 236.86,-708.14 245.16,-699.85 C20.1@245.16,-695.91 ; C24.1 263.17,-491.31 281.05,-491.31 298.98,-509.24 U5.2 298.98,-565.32 340.29,-606.63 v2@371.87,-606.63 ; Q4.2 449,-402.19 v1(460.16,-402.19) ; v2(622.09,-556.94) 632.69,-567.55 C18.2 ; C7.1 C7.1@661,-440.79 ; C18.2@658.53,-579.44 668.29,-569.68 v2(684.69,-569.68) ; v2(683.73,-405.6) 683.73,-419.59 690.42,-426.27 ; 724.86,-618.17 724.86,-644.79 727.15,-647.08 ; v1(988.4,-497.86) 991.03,-500.5 1013.03,-500.5 1020.71,-508.18 1034.08,-508.18 ; C26.1 1014.55,-500.94 C26.1@1020.71,-507.1 ; 1034.08,-507.1 U7.7 U7.2 ; C1.1 1050.02,-698.43 v2(1050.02,-700.28)
  Top Layer w10: U8.27 -154.21,-533.19 -150.18,-537.22 -134.47,-552.93 -131.84,-550.3 v1(-120.42,-550.3) ; TP5.0@11.62,-263.89 TP5.0@14.36,-261.15
  Top Layer w15.75: TP5.0@14.36,-261.15 14.36,-259.69 20.36,-253.7 TP5.0@20.36,-249.19 ; C35.1 C35.1@383.33,-141.81
  Top Layer w19.68: v2@371.87,-606.63 v2(375.07,-606.63) ; J1.1@909.45,-55.34 J1.1 ; v1@1015.51,-394.92 v1@1016.26,-394.92 ; v1@1017.33,-395.98 v1(1017.33,-394.92)
  Bottom Layer w9.84: v2(392.31,-474.88) 423.7,-443.5 R21.1 ; v2(683.73,-405.6) v2@693.13,-405.6 ; v1(988.4,-497.86) 988.71,-498.17 988.71,-528.95 R23.2
  Bottom Layer w11.81: C31.1 819.83,-511.05 855.3,-546.53 973.73,-546.53 989.02,-531.23 R23.2
  Bottom Layer w15.75: v1@809.7,-195.6 v1(811.84,-195.6) 811.84,-157.2 C15.2 ; v1@812.52,-195.6 v1@813.34,-194.78
  Bottom Layer w19.68: D4.2 886.19,-139.34 886.19,-135.12 888.06,-133.25 888.06,-108.2 928.94,-67.31 J1.1 J1.1@913.63,-70.65 ; U2.1@892.92,-252.6 U2.1@895.31,-250.21 ; U2.1@893.27,-261.3 U2.1@893.27,-254.3 ; U2.1@893.65,-261.19 U2.1@900.31,-267.85
  other v1: 732.06,-687.64 847.86,-663.45 845.01,-628.52 1081.15,-613.14 -77.35,-584.79 -80.15,-518.44 1073.95,-507.5 1017.72,-356.93 1067.96,-320.45 -214.1,-289.39 18.85,-253.6 -205.02,-227.77 -66.46,-219.31 -180.26,-170.83 404.81,-170.18 689.31,-120.55 870.99,-81.98 25.69,-20.06
  other v2: 1051.4,-652.13 731.56,-405.5 920.92,-248.2 488.27,-191.63
INPUT: C34.1 D9.1 R31.1 | length 87.1
  Top Layer w11.81: D9.1 693.74,-89.58 707.7,-89.58 721.7,-103.59 725.63,-103.59 R31.1 727.9,-105.86 752.08,-105.86 762.32,-95.63 C34.1
IOUT: R4.2 U3.19 | length 164.4
  Bottom Layer w10: U3.19 82.81,-89.71 68.23,-75.13 59.86,-75.13 51.83,-67.09 51.83,-35.52 61.85,-25.5 R4.2
IV_OUT: F1.1 J1.2 | length 111.6
  Bottom Layer w23.62: F1.1 920.29,-158.37 J1.2 J1.2@976.13,-107.61
LD-5V: J4.2 Q1.3 | length 422.5
  Top Layer w15.75: J4.2@470.35,-274.91 407.36,-274.91 395.98,-286.29 395.98,-409.12 416.39,-429.53 550.86,-429.53 Q1.3@585.11,-395.28
  Top Layer w19.68: Q1.3@585.11,-395.28 Q1.3
MCU-I2C_SCL1: J2.5 U8.21 | length 510.3
  Top Layer w8: U8.21 -134.53,-410.17 -130.45,-406.09 -130.45,-385.61 -62.88,-318.04 20.77,-318.04 142.31,-196.49 189.27,-196.49 199.8,-185.97 J2.5
MCU-I2C_SDA1: J2.4 U8.19 | length 483.9
  Top Layer w8: U8.19 -94.43,-461.59 -94.43,-404.91 -24.17,-334.64 27.11,-334.64 150.18,-211.58 195.52,-211.58 216.6,-190.51 216.6,-167.03 J2.4
MCU-XSHUT: J2.3 U8.18 | length 486
  Top Layer w8: U8.18 -75.47,-422.16 -1.24,-347.93 101.81,-347.93 239.17,-210.56 J2.3
MCU_KEY1: J3.6 U8.22 | length 961.5
  Top Layer w8: v1(-161.47,-341.49) -161.47,-353.85 -145.53,-369.79 -145.53,-399.85 -151.69,-406 -151.69,-459.8 U8.22
  Top Layer w9.84: v1(480.66,-29.98) 480.66,-47.2 J3.6
  VCC w8: v1@-160.22,-341.49 -160.22,-271.91 -31.58,-143.28 256.62,-143.28 369.92,-29.98 v1(480.66,-29.98)
MCU_KEY2: J3.7 U8.15 | length 859
  Top Layer w8: U8.15 2.39,-513.5 14.64,-501.25 14.64,-422.46 v1@7.58,-415.4 ; J3.7@552,-71.95 J3.7@553.35,-70.6
  Top Layer w9.84: v1(548.82,-21.88) 548.82,-33.3 J3.7@553.08,-37.56 ; J3.7@553.08,-48.75 J3.7
  VCC w8: v1(6.16,-417.38) 29.19,-417.38 383.57,-63 507.7,-63 v1(548.82,-21.88)
MCU_KEY3: J3.8 U8.16 | length 881.4
  Top Layer w8: U8.16 -11.68,-481.21 v1(-11.68,-453.08) ; J3.8 J3.8@640.16,-64.96
  VCC w8: v1(-11.68,-453.08) 34.56,-453.08 402.89,-84.74 521.98,-84.74 586.62,-20.11 v1(621.89,-20.11)
MCU_Laser: Q4.1 R21.2 U8.20 | length 935.5
  Top Layer w8: U8.20 v1@-114.84,-422.45
  Bottom Layer w8: v1(-114.69,-420.18) -68.13,-466.73 -68.13,-483.01 -27.09,-524.05 -27.09,-595.03 -3.25,-618.88 46.51,-618.88 138.58,-526.8 139.01,-526.8 161.81,-503.99 491.26,-503.99 504.38,-490.88 R21.2 503.44,-442.56 503.44,-402.5 v1(502.51,-401.56)
MCU_LCD_RX: J3.5 U8.9 | length 969.7
  Top Layer w8: U8.9 -2.09,-631.61 4.13,-625.39 75.9,-625.39 88.16,-613.13 88.16,-545.84 64.09,-521.77 64.09,-453.09 119.7,-397.48 278.99,-397.48 315.61,-360.86 315.61,-335.41 457.75,-193.26 457.75,-112.87 411.61,-66.73 J3.5
MCU_LCD_TX: J3.4 U8.10 | length 992.9
  Top Layer w8: U8.10 -3.89,-611.93 -2.27,-610.31 65.08,-610.31 71.32,-604.06 71.32,-546.78 48.71,-524.17 48.71,-447.35 114.57,-381.49 270.95,-381.49 300.52,-351.92 300.52,-326.38 435.58,-191.32 435.58,-119.93 423.72,-108.07 357.98,-108.07 351.53,-101.62 351.53,-59.8 J3.4
MCU_LEDIO2: J3.3 U8.23 | length 767
  Top Layer w8: U8.23 -173.9,-435.24 -168.43,-429.77 v1(-168.43,-379.27)
  VCC w8: v1(-168.43,-379.27) -168.43,-367.24 -184.37,-351.3 -184.37,-269.07 -37.61,-122.31 205.62,-122.31 276.37,-51.56 v1(276.37,-37.49)
MCU_NPOUT1: R22.1 U7.3 U8.6 | length 1441.7
  Top Layer w7.87: U8.6 -95.87,-663.82 -95.87,-683.73 -71.83,-707.77 86.41,-707.77 v1(87.23,-706.96) ; v1(1090.19,-577.24) 1090.84,-577.24 1101.73,-566.36 1101.73,-547.94 1101.41,-547.63 U7.3@1103.02,-546.02
  Bottom Layer w7.87: v1(87.23,-706.96) 87.23,-702.7 96.93,-693 96.93,-660.2 114.38,-642.75 215.51,-642.75 249.95,-608.31 249.95,-588.9 259.74,-579.11 562.06,-579.11 600.91,-540.25 600.91,-515.17 617.03,-499.06 731.94,-499.06 767.53,-534.66 767.53,-563.16 783.96,-579.58 827.1,-579.58 830,-582.48 R22.1 1006.19,-579.86 1087.57,-579.86 v1(1090.19,-577.24)
MCU_NPOUT2: R23.1 U7.4 U8.7 | length 1537.9
  Top Layer w7.87: U8.7 -75.47,-677.96 -70.75,-682.68 -70.75,-683.09 -61.98,-691.85 -38.52,-691.85 -31.61,-684.94 v1(-27.35,-684.94) ; U7.4 1101.41,-473.64 1129.62,-501.85 v1(1129.62,-561.27)
  Bottom Layer w7.87: v1(-27.35,-684.94) -23.08,-684.94 -12.63,-695.39 54.64,-695.39 72.87,-677.16 72.87,-663.1 109.16,-626.81 205.7,-626.81 234.99,-597.52 234.99,-582.2 253.04,-564.15 555.86,-564.15 585.95,-534.06 585.95,-501.2 603.05,-484.1 738.13,-484.1 782.49,-528.46 782.49,-547.66 798.3,-563.46 999.48,-563.46 1010.03,-552.91 1028.41,-552.91 ; R23.1 1028.41,-552.91 ; v1(1129.62,-561.27) 1129.11,-560.76 1106,-560.76 1098.15,-552.91 1028.41,-552.91
MCU_PC4-GPIO: J2.2 U8.17 | length 482
  Top Layer w8: U8.17 -55.19,-461.73 -55.19,-435.93 14.83,-365.9 111.03,-365.9 258.86,-218.07 J2.2
MCU_SIG_IN1: C31.2 R25.2 U8.8 | length 1228.5
  Top Layer w7.87: U8.8 -55.79,-656.34 -53.97,-654.52 v1(11.85,-654.52) ; v1(803.37,-408.31) 786.55,-391.49 786.55,-317.61 793.89,-310.27 808.9,-310.27 819.98,-299.18 R25.2
  Bottom Layer w7.87: v1(11.85,-654.52) 32.12,-654.52 74.79,-611.85 191.95,-611.85 220.03,-583.77 220.03,-576 246.84,-549.19 549.66,-549.19 570.99,-527.86 570.99,-479.8 581.65,-469.14 815.31,-469.14 C31.2 817.86,-427.06 803.37,-412.57 v1(803.37,-408.31)
NetC4_2: C4.2 U3.14 U3.15 | length 118.3
  Bottom Layer w15.75: C4.2 -80.03,-191.84 -45.14,-156.95 U3.14
NetC8_2: C8.2 U3.17 | length 64.3
  Bottom Layer w10: U3.17 C8.2@31.63,-54.54
NetC10_2: C10.2 U8.26 | length 63.6
  Top Layer w11.81: v1(-258.89,-512.33) -257.72,-513.5 U8.26
  Bottom Layer w11.81: v1(-258.89,-512.33) C10.2
NetC12_2: C12.2 C13.2 L5.1 U3.2 | length 206.1
  Bottom Layer w15.75: U3.2@185.6,-357.66 185.6,-311.34 199.32,-297.62 291.43,-297.62 C13.2 L5.1@338.14,-293.94
NetC15_1: C15.1 D4.1 F1.2 R4.1 R11.2 R12.2 U2.2 U2.3 | length 1165.2
  Bottom Layer w19.68: R11.2 149.82,-26.05 R4.1 206.08,-25.5 260.5,-79.92 747.07,-79.92 762.95,-95.79 806.31,-95.79 811.82,-90.29 C15.1 821.66,-96.19 844.2,-96.19 856.89,-108.88 856.89,-164.36 854.34,-166.91
  Bottom Layer w23.62: U2.3@806.34,-319.39 U2.3@811.9,-324.94 ; U2.3@812.03,-325.08 U2.3@811.9,-324.94 ; C15.1@818.46,-86.35 C15.1@822.67,-86.35 ; 854.34,-166.91 854.34,-176.86 851.46,-179.73 ; F1.2 857.63,-185.89 851.46,-179.73 ; U2.2 U2.2@893.38,-325.19 ; U2.2@898.95,-319.61 U2.2@893.38,-325.19 ; U2.3@811.9,-324.94 U2.3 U2.2@893.38,-325.19 ; U2.3@811.9,-324.94 817.34,-319.5 843.31,-319.5 851.46,-311.35 851.46,-179.73
NetC21_1: C21.1 R17.2 R19.2 U5.3 | length 198.7
  Top Layer w11.81: U5.3 260.25,-537.16 260.25,-592.77 267.17,-599.69 291.69,-599.69 v1(293.95,-601.95)
  Top Layer w19.68: U5.3 U5.3@261.99,-536.25
  Bottom Layer w11.81: R19.2 247.84,-665.61 278.98,-665.61 R17.2 279.75,-665.87 279.75,-629.77 C21.1 280.01,-615.29 293.36,-601.95 v1(293.95,-601.95)
NetC24_2: C24.2 U6.4 | length 68.4
  Top Layer w11.81: U6.4 205.8,-533.94 210.72,-529.02 210.72,-511.71 210.88,-511.55 210.88,-502.82 221.84,-491.86 C24.2@221.84,-489.89
NetC26_2: C26.2 U7.1 | length 40.2
  Top Layer w19.68: C26.2 1015.79,-543.52 1047.28,-543.52 U7.1
NetC35_2: C35.2 D1.2 J2.1 L3.2 | length 346.2
  Top Layer w19.68: v2(265.79,-345.91) 265.79,-259.03 343.96,-180.86 C35.2 336.24,-143.78 320.87,-159.15 J2.1@281.5,-159.15
  Bottom Layer w19.68: v2(265.79,-345.91) 287.13,-367.25 L3.2
NetC36_1: C36.1 R3.2 R36.1 U9.3 | length 155
  Top Layer w11.81: v1@762.22,-702.78 766.49,-698.51 799.6,-698.51 U9.3
  Bottom Layer w11.81: R3.2 760.8,-680.3 760.8,-695.45 764.54,-699.19 v1(764.54,-702.39) ; R3.2@764.65,-674.39 799.63,-639.41 C36.1 800.01,-637.06 800.01,-600.83 R36.1 ; R36.1@801.28,-608.99 R36.1@801.34,-608.92
NetC37_1: C37.1 U9.1 | length 47.2
  Top Layer w11.81: C37.1@759.33,-638.34 C37.1 761.46,-638.5 775.97,-623.99 798.81,-623.99 U9.1
NetC37_2: C37.2 L1.1 U9.6 | length 116.5
  Top Layer w11.81: C37.2 C37.2@760.39,-600.03 ; C37.2@765.1,-597.43 880.29,-597.43 880.33,-597.47
NetD2_1: D2.1 D3.1 L2.2 | length 65.7
  Top Layer w39.37: 844.99,-354.43 862.52,-371.96 862.52,-380.23 885.59,-403.29
NetD5_1: D5.1 L4.2 U5.1
NetE1_2: E1.2 J1.4 L2.1 | length 257.4
  Top Layer w11.81: L2.1@875.74,-215.55 L2.1@876,-215.29
  Top Layer w39.37: L2.1@891.5,-202.9 944.09,-202.9 972.28,-231.09 972.28,-251.18 973.16,-252.06 978.13,-257.02 978.13,-264.82 E1.2
  Top Layer w47.24: E1.2@973.16,-252.06 1015.34,-252.06 J1.4
NetF2_2: F2.2 U7.5 | length 153
  Top Layer w19.68: v2(1042.52,-427.58) 1044.78,-429.84 1051.93,-429.84 1075.82,-453.73 U7.5
  Bottom Layer w19.68: F2.2 1019.28,-447.63 1039.33,-427.58 v2(1042.52,-427.58)
NetJ3_2: J3.2 L9.2 | length 123.1
  Top Layer w19.68: L9.2@124.48,-129.72 144.07,-129.72 168.7,-105.09 168.7,-97.05 199.02,-66.73 J3.2
NetQ1_1: Q1.1 Q4.3 R20.1 | length 138.9
  Top Layer w15.75: Q4.3@478.39,-472.52 478.39,-471.38 486.58,-463.19 Q1.1@558.21,-463.19 ; Q1.1@558.21,-461.89 Q1.1@558.21,-463.19 ; Q1.1 Q1.1@559.52,-472.05 ; R20.1 563.24,-503.54 559.52,-499.81 Q1.1@559.52,-472.05 ; Q1.1@558.21,-463.19 558.21,-470.75 Q1.1@559.52,-472.05
NetQ3_1: Q3.1 R31.2 R32.2 | length 120.3
  Top Layer w9.84: R32.2 732.28,-171.49 732.28,-162.75 728.99,-159.46 728.99,-146.33 731.34,-143.98 731.34,-133.66 735.23,-129.77 Q3.1
NetQ3_3: Q3.3 R25.1 R29.2 | length 121.8
  Top Layer w7.87: R25.1 821.95,-231.09 825.89,-227.16 825.89,-225.19 834.67,-216.41 834.67,-161.26 840.58,-155.36 Q3.3 843.93,-154.13 R29.2
NetR12_1: R12.1 U3.22 | length 67.3
  Bottom Layer w10: U3.22 159.58,-92 185.91,-65.67 R12.1
NetR15_2: R15.2 U3.13 | length 36.7
  Bottom Layer w15.75: R15.2 U3.13@-73.96,-115.65
NetR34_1: R34.1 U9.4 | length 77.4
  Top Layer w9.84: v1(863.1,-701.01) 864.66,-699.44 892.52,-699.44 U9.4
  Bottom Layer w9.84: v1(863.1,-701.01) 863.84,-701.75 886.75,-701.75 892.52,-695.98 R34.1@892.52,-687.17 ; R34.1@889.73,-689.96 R34.1@892.52,-687.17 ; R34.1 R34.1@892.52,-687.17
NRST: J5.3 U8.2 | length 257.4
  Top Layer w8: v1(-183.72,-703.14) -183.72,-701.06 -173.9,-691.23 U8.2
  VCC w8: J5.3 -317.94,-562.28 -301.84,-562.28 -183.72,-680.4 v1(-183.72,-703.14)
OUT_INPUT: C33.2 D9.2 D10.1 TP1.1 | length 161.4
  Top Layer w23.62: D9.2 692.6,-30.69 D10.1@775.25,-30.69 ; D10.1@774.92,-31.72 TP1.1 ; TP1.1@829.92,-34.86 TP1.1@834.97,-39.91
OUT_NPN: C27.2 D6.2 D8.1 F2.1 J1.3 | length 105
  Bottom Layer w31.5: 963.05,-223.12 963.05,-209.98 J1.3 J1.3@1020.59,-149.72 ; C27.2@969.68,-299.35 C27.2
SGND: C14.2 pad.1 R33.2
SPI_MISO: U3.10 U8.13 | length 291.2
  Top Layer w8: U8.13 13.59,-552.87 13.1,-553.37 v1(12,-553.37)
  VCC w8: v1(12,-553.37) v1@12,-551.28
  Bottom Layer w8: U3.10 -19.55,-382.19 -52.76,-415.4 -52.76,-472.52 12,-537.28 v1(12,-553.37)
SPI_MOSI: U3.9 U8.14 | length 285.9
  Top Layer w8: U8.14 v1@30.04,-533.19
  Bottom Layer w8: U3.9 6.04,-382.66 -33.21,-421.92 -33.21,-467.82 v1(31.85,-532.89)
SPI_SCLK: R13.1 U3.8 U8.12 | length 308.6
  Top Layer w8: U8.12 38.08,-572.56 v1(41.97,-568.67)
  Bottom Layer w8: U3.8 31.63,-498.97 53.47,-520.82 53.47,-561.94 46.75,-568.67 v1(41.97,-568.67)
SPI_SSN: U3.7 U8.11 | length 335.6
  Top Layer w8: U8.11 v1@13.38,-592.24
  Bottom Layer w8: v1(16.03,-591.97) 53.09,-591.97 67.5,-577.55 67.5,-509.17 53.41,-495.08 53.41,-415.72 57.22,-411.91 U3.7
SWCLK: J5.5 R6.2 U8.32 | length 157.1
  Top Layer w9.84: J5.5 -316.26,-657.03 -290.84,-631.61 U8.32
  Bottom Layer w9.84: J5.5 -322.64,-656.49 -275.75,-656.49 R6.2@-275.21,-655.94
SWDIO: J5.4 R7.1 U8.1 | length 205.3
  Top Layer w9.84: v1(-219.62,-688.77) -216.98,-686.14 -203.36,-686.14 -193.58,-676.36 U8.1
  Bottom Layer w7.87: R7.1@-275.63,-617.66 -275.63,-619.63 -255.86,-639.4 -255.86,-673.47 -243.24,-686.09 -222.31,-686.09 v1(-219.62,-688.77)
  Bottom Layer w9.84: J5.4 -316.26,-607.03 -302.86,-620.43 -278.41,-620.43 R7.1@-275.63,-617.66
UART0_RX: TP2.0 U8.3 | length 203.6
  Top Layer w8: U8.3 -154.21,-695.12 -149.86,-699.47 v1(-149.86,-703.7)
  GND w8: v1(-278.92,-696.62) -243.69,-661.39 -192.17,-661.39 v1(-149.86,-703.7)
UART0_TX: TP3.0 U8.4 | length 253.3
  Top Layer w8: U8.4@-134.53,-677.92 -133.8,-678.65 -133.8,-686.26 v1(-111.83,-708.23)
  Bottom Layer w8: v1(-111.83,-708.23) -109.85,-706.25 -109.85,-687.53 -73.91,-651.58 -23.47,-651.58 5.32,-680.37 38.73,-680.37 49.58,-669.52 v1(49.58,-668.16)
VCC_24V: C1.2 C3.2 C28.2 D2.2 D6.1 R34.2 U7.6 U9.5 | length 530.1
  Top Layer w9.84: U9.5 917.03,-660.33 ; 915.13,-660.74 916.62,-660.74 917.03,-660.33 ; v1(933.38,-639.91) 930.74,-642.54 930.74,-646.62 917.03,-660.33
  Top Layer w19.68: D2.2 D2.2@959.43,-553.44 ; D2.2@960.89,-554.91 D2.2@959.43,-553.44 ; D2.2@960.89,-553.44 D2.2@959.43,-553.44 ; U7.6@1049.05,-467.73 1043.19,-467.73 1042.85,-468.07 960.42,-468.07 948.89,-479.6 948.89,-509.57 v2(946.63,-511.83) 948.89,-514.09 948.89,-543.55 958.78,-553.44 D2.2@959.43,-553.44
  Bottom Layer w9.84: R34.2 921.91,-647.64 929.65,-639.91 v1(933.38,-639.91)
  Bottom Layer w15.75: v2(946.63,-511.83) 946.63,-510.76 919.33,-483.45 919.33,-427.62 931.6,-415.35 981.79,-415.35 990.56,-406.58 D6.1@990.56,-342.78
VCC_OUT_3V3: C11.2 C23.2 C25.2 J5.1 L3.1 L5.2 L9.1 Q3.2 R6.1 R7.2 R32.1 TP4.0 U6.5 U8.28 | length 2575.4
  Top Layer w10: v2@-259.43,-553.22 -227,-553.22 U8.28@-225.87,-552.09
  Top Layer w11.81: C25.2@80.42,-164.35 C25.2
  Top Layer w15.75: v2(-270.81,-546.09) -266.55,-546.09 v2@-259.43,-553.22 ; L9.1 79.9,-163.84 C25.2@80.42,-164.35 ; v1(110.85,-506.51) TP4.0@110.85,-502.25 ; TP4.0@114.73,-498.37 115.86,-499.5 134.45,-499.5 141.46,-506.51 145.69,-502.28 145.69,-498.87 TP4.0@122.87,-498.87 ; v2(621.17,-405.5) 624.19,-402.49 624.19,-379.75 630.4,-373.54 678.72,-373.54 684.66,-367.6 685.38,-367.6 688.33,-364.65 754.45,-364.65 766.15,-352.95 766.15,-311.28 772.07,-305.37 772.07,-183.5 769.51,-180.95 Q3.2
  Top Layer w19.68: J5.1 -257.89,-457.03 -207.29,-406.43 -207.29,-334.09 -142.99,-269.78 -74.3,-269.78 30.62,-164.87 C25.2
  VCC w19.68: J5.1 -315.31,-464.91 -299.16,-464.91 -287.74,-476.33 -287.74,-524.36 -288.54,-525.17 ; -288.54,-491.68 -288.54,-525.17 ; 92.93,-508.27 92.93,-585.79 52.15,-626.57 -15.96,-626.57 -37.92,-648.53 -176.84,-648.53 -270.81,-554.56 v2(-270.81,-546.09) -270.81,-542.9 -288.54,-525.17
  Bottom Layer w9.84: v1@110.85,-508.21 115.3,-503.76 v1@115.3,-498.29
  Bottom Layer w11.81: -270.81,-568.26 v2(-270.81,-546.09) ; 101.63,-480.57 107.54,-480.57 109.79,-482.82 ; 112,-485.03 115.3,-488.32 v1@115.3,-498.29
  Bottom Layer w15.75: C11.2 -271.21,-578.54 -257.61,-592.15 -257.61,-598.69 -236.5,-619.79 R7.2 ; R6.1@-235.84,-655.94 -235.84,-632.7 ; 105.28,-482.82 107.5,-485.03 112,-485.03 344.69,-485.03 362.54,-467.19 362.54,-376.16 361.17,-374.79 ; L5.2 339.33,-367.04 L3.1 346.66,-374.79 361.17,-374.79 ; v2(621.17,-405.5) 590.47,-374.79 361.17,-374.79
  other v1: 89.07,-490.78
VOUT: C8.1 R11.1 U3.21 | length 105.1
  Bottom Layer w10: C8.1@74.51,-57.39 106.98,-57.39 133.99,-84.4 U3.21
pads on no net: J2.A1 J2.A2 U3.3 U3.18 U3.20 U8.0@-229.02,-667.05 U8.5 U8.24 U8.25 U8.29 U8.30 U8.31

## Polygon pours and split planes (outlines as drawn)
GND on Top Layer "Top Layer-No Net" (solid, pour order 10): 0,0 943,0 947,0 1191.04,-244.04 1252.76,-244.04 1251.73,-556.55 1243.62,-571.88 1223.02,-581.01 1185.04,-582.09 1150.63,-591.24 1126.2,-606.89 1100.97,-632.05 1084.13,-662.71 1075.27,-695.31 1075.3,-732.29 -349.39,-732.29 -358.58,-724.4 -368.32,-617.95 -373.74,-511.87 -374.42,-416.86 -386.22,-381.85 -383.2,-271.59 -371.7,-258.67 -363.7,-160.7 -355.67,-149.37 -337.94,-141.64 -180.15,-140.69 -154.28,-130.26 -136.78,-106.83 -131.43,-84.86 -120.02,-76.73 0,-76.63 0,0
GND on GND "Top Layer-No Net" (solid, pour order 12): 0,0 945.4,-0.66 1191.04,-244.04 1252.76,-244.04 1251.29,-556.75 1246.71,-566.6 1234.4,-577.27 1208.16,-580.82 1171.65,-585.07 1134.07,-601.3 1107.38,-624.36 1088.31,-653.58 1077.66,-682.55 1075.3,-732.29 -349.39,-732.29 -357.6,-725.65 -366.93,-634.53 -371.24,-555.96 -374.34,-413.78 -386.22,-381.85 -383.2,-271.59 -371.27,-259.66 -362.29,-156.85 -352.22,-145.73 -338.16,-141.53 -185.04,-141.51 -161.66,-135.38 -142.09,-117.55 -133.73,-87.74 -121.65,-76.24 0,-76.63 0,0
GND on VCC "Top Layer-No Net" (solid, pour order 14): 0,0 945.4,-0.38 1191.04,-244.04 1252.76,-244.04 1251.47,-553.71 1246.71,-566.6 1231.68,-579.12 1185,-581.7 1145.39,-594.31 1112.29,-619.14 1089.63,-649.48 1076.92,-686.66 1075.3,-732.29 -349.39,-732.29 -357.6,-725.65 -363.85,-666.11 -371.43,-564.97 -374.34,-413.78 -386.22,-381.85 -383.2,-271.59 -371.54,-258.36 -363.51,-157.77 -351.8,-146.21 -335.53,-141.74 -182.18,-141.44 -158.74,-133.5 -141.74,-117.17 -133.73,-87.74 -122.62,-76.63 0,-76.63 0,0
GND on Bottom Layer "Top Layer-No Net" (solid, pour order 16): 0,0 945.4,-0.38 1191.04,-244.04 1252.76,-244.04 1251.75,-555.37 1243.44,-571.66 1223.64,-580.44 1176.89,-582.65 1142.48,-596.37 1114.08,-617.25 1087.76,-653.16 1075.91,-692.65 1075.3,-732.29 -349.39,-732.29 -357.6,-725.65 -365.98,-642.71 -373.3,-526.91 -374.93,-415.45 -386.22,-381.85 -383.2,-271.59 -371.27,-256.45 -365.09,-165.84 -354.72,-147.28 -335.53,-141.59 -176.24,-140.64 -151.94,-128.42 -135.75,-103.46 -133.73,-87.74 -122.62,-76.63 0,-76.63 0,0

## Keep-outs
Keep-Out Layer:
  circle w5: c1195.3,-330.71 r35.43
  circle w5: c-332.26,-330.71 r35.43
  lines w5: -386.23,-382.25 cw(c2338.13,-420.35) -382.43,-271.65 ; -365.1,-169.48 -367.21,-193.25 -369.8,-229.59 -371.27,-253.23 -371.27,-259.66 -383.2,-271.59 -383.2,-286.45 -384.27,-310.29 -385.13,-334.13 -385.78,-357.99 -386.22,-381.85 -374.34,-413.78 -374.4,-474.23 -373.13,-524.78 -372.61,-536.95 -371.4,-560.55 -369.97,-584.13 -368.33,-607.7 -363.27,-672.2 -357.6,-725.65 -349.39,-732.29 1075.3,-732.29 1075.35,-699.97 ; -364.93,-168.38 cw(c-335.53,-171.12) -335.53,-141.59 ; -335.53,-141.74 -187.73,-141.74 ccw(c-187.73,-87.74) -133.73,-87.74 -122.62,-76.63 0,-76.63 0,0 947,0 1191.04,-244.04 1252.76,-244.04 1252.13,-549.57 cw(c1221.25,-549.57) 1221.25,-580.45 1205.27,-580.45 ; 341.8,-414.75 118.7,-414.75 118.7,-460.7 343.3,-460.7 ; 343.11,-460.7 343.11,-414.75 ; 1075.12,-710.42 cw(c1205.04,-710.42) 1205.04,-580.5 ; 415.41,-353.39 669.68,-353.39 669.68,-294.34 415.41,-294.34 415.41,-353.39

## Other copper
Top Layer:
  rectangle net VCC_24V: 929.55,-718.81 995.27,-531.48
  rectangle net NetC37_2: 867.53,-627.35 917,-430.06
  rectangle net VCC_24V: 873.86,-677.68 956.4,-643.79
  rectangle net GND: 725.73,-677.42 861.45,-654.14
  rectangle net GND: 828.59,-680.14 860.28,-621.54
  rectangle net GND: 713.18,-699.03 741.13,-595.14
  rectangle net DV5V/0.5A: 322.87,-706.92 454.05,-631.62
  rectangle net NetD5_1: 331.67,-567.45 432.32,-513.89
  rectangle net DV5V/0.5A: 115.74,-713.65 159.18,-678.46
  rectangle net DV5V/0.5A: 108.5,-713.65 142.13,-627.74
  rectangle net GND: 191.03,-722.32 278.62,-676
  rectangle net NetD5_1: 430.64,-580.85 587.05,-526.9
  rectangle net GND: 1000.5,-521.73 1067.66,-494.63
  rectangle net NetD2_1: 798.46,-373.12 900.98,-321.29
  rectangle net +12.79V: 539.15,-690.57 699.76,-625.68
  rectangle net DV5V/0.5A: 631.05,-535.41 776.33,-473.74
  rectangle net GND: 674.19,-617.14 735.29,-594.58
  rectangle net GND: 172.08,-722.21 200.7,-677.73
  rectangle net GND: 162.15,-671.54 187.81,-486.67
  rectangle net GND: 157.64,-670.26 179.04,-659.55
  rectangle net GND: 165.24,-525.22 177.11,-488.86
  rectangle net VCC_OUT_3V3: 107.11,-515.82 154.68,-491.32
  rectangle net VCC_OUT_3V3: 112.66,-552.04 147.33,-507.7
  rectangle net GND: 608.7,-607.67 708.35,-551.2
  rectangle net GND: 167.05,-720.91 183.81,-670.64
  rectangle net GND: 152.49,-655.17 182.65,-559
  rectangle net GND: 644.29,-463.47 736.55,-389.07
  rectangle net GND: 1012.07,-718.27 1062.61,-575.7
  rectangle net GND: 596.82,-598.84 629.73,-549.37
  rectangle net GND: 443.57,-413.98 471.41,-374.92
  rectangle net GND: 662.21,-615.73 713.39,-585.69
  rectangle net NetD2_1: 848.21,-372.86 901.2,-286.36
  rectangle net NetD2_1: 875.67,-422.62 976.74,-385.88
  rectangle net +12V: 501.1,-144.48 574.33,-124.23
  rectangle net +12V: 522.37,-180.07 553.67,-136.1
  rectangle net GND: 375.38,-189.99 416.06,-133.99
  pour cut-out: -249.12,-216.16 -231.35,-267.25 -234.23,-328.1 -238.58,-419.86 -383.96,-419.86 -374.79,-213.19 -374.33,-213.65 -283.16,-213.65
  pour cut-out: 1259.6,-258 1150.6,-258 1102.86,-305.74 1102.86,-473.46 1116.73,-548.23 1249.04,-555.18
  pour cut-out: 168.27,0.36 168.27,-102.64 672.27,-102.64 677.27,-97.64 674.27,-94.64 674.27,0.36 239.27,0.36 238.27,-0.64 196.27,0.36
  pour cut-out: 937,0 863,-74 1095,-306 1109,-306 1179,-236 943,0
  pour cut-out: -261.07,-143.39 -262,-144.32 -262,-247 -249.43,-247 -248.82,-246.39 -249.08,-246.13 -249.08,-142.74 -261.19,-142.74 -261.9,-143.45 -261.9,-143.84
GND:
  region net GND: 939.36,-71.85 912.71,-45.2 836.42,-121.49 863.07,-148.14
  region net GND: 1129.76,-255.76 1103.11,-229.11 1023.28,-308.95 1049.93,-335.6
  pour cut-out: -253,-135 -252.08,-135.92 -252.08,-246.08 -254.92,-246.08 -254,-247 -246,-247 -246,-134 -247,-135
  pour cut-out: -380.89,-246.08 -251.01,-246.08 -248.01,-249.08 -249.01,-250.08 -249.01,-390.09 -262,-403.08 -383.01,-405.08 -381.01,-396.08 -381.01,-247.92
  pour cut-out: 1259.6,-258 1150.6,-258 1102.86,-305.74 1102.86,-473.47 1115.1,-548 1248.25,-552.78
  pour cut-out: 945.96,-0.75 1177.22,-232.01 1183.46,-232.01 1109,-306.47 873.11,-70.57 869.61,-70.57 942.6,2.42 945.4,-0.38 945.4,-0.94
  pour cut-out: 870.72,-58.37 871.12,-58.77 889.96,-58.77 889.96,-2.38 888.76,-1.19 887.97,-1.99 871.12,-1.99 871.12,-58.04 870.98,-58.17 871.32,-58.5 871.65,-58.5
VCC:
  rectangle net DV5V/0.5A: 107.2,-718.3 146.53,-660.6
  rectangle net DV5V/0.5A: 648,-541.48 735.44,-494.72
  rectangle net DV5V/0.5A: 346.68,-716.49 421.8,-672.58
  rectangle net +12.79V: 595.98,-678.45 665,-640.3
  rectangle net DV5V/0.5A: 640.55,-541.6 665.75,-495.96
  rectangle net VCC_OUT_3V3: 77.15,-518.35 132.33,-476.33
  region net GND: 884.03,-115.71 941.53,-58.21 922.66,-39.34 865.16,-96.84
  region net GND: 1071.3,-307.77 1128.8,-250.27 1109.93,-231.4 1052.43,-288.9
  pour cut-out: -262,-247 -262,-142 -245,-142 -252,-149 -252,-245 -260,-245
  pour cut-out: -380.89,-246.08 -251.01,-246.08 -248.01,-249.08 -249.01,-250.08 -249.01,-403.08 -252.01,-406.08 -383.01,-405.08 -381.01,-396.08 -381.01,-247.92
  pour cut-out: 1259.6,-258 1150.6,-258 1103.1,-305.5 1100.98,-467.09 1115.1,-548 1248.25,-552.78
  pour cut-out: 871.77,-71.94 1109,-309.17 1109,-306.47 1180.25,-235.22 944.28,0.74 944.28,3.35 942.04,3.35 872.22,-66.46 877.08,-71.32 877.08,-75.61
  pour cut-out: 871.12,-1.99 871.12,-58.37 870.92,-58.57 871.12,-58.77 889.96,-58.77 889.96,-2.38 889.56,-1.99
Bottom Layer:
  rectangle net GND: 1066.25,-488.32 1113.42,-254.52
  rectangle net SGND: 1170.38,-461.76 1242.14,-341.16
  rectangle net OUT_NPN: 948.37,-395.66 974.3,-205.6
  rectangle net GND: 1064.81,-418.75 1103.74,-330.31
  rectangle net GND: 1057.2,-409.08 1091.36,-271.4
  rectangle net VCC_OUT_3V3: -283.18,-591.84 -257.92,-554.61
  rectangle net VCC_OUT_3V3: 78.12,-517.28 126.96,-477.2
  rectangle net GND: 1012.65,-331.89 1075.67,-271.67
  rectangle net GND: 983.58,-265.71 1028.49,-236.83
  rectangle net GND: 998.02,-321.21 1084.6,-260.46
  rectangle net GND: 968.96,-551.2 992.68,-529.55
  rectangle net GND: 1066.18,-538.89 1164.05,-482.54
  rectangle net GND: 1109.86,-495.04 1151.54,-413.53
  rectangle net SGND: 1196.08,-549.08 1244.55,-471.89
  rectangle net VCC_OUT_3V3: 83.4,-493.44 109.61,-470.78
  rectangle net GND: 882.77,-275.27 937.81,-231.57
  rectangle net GND: 867.67,-90.74 914.37,-73.36
  rectangle net GND: 874.7,-106.06 926.84,-85.03
  rectangle net GND: 878.02,-163.84 895.13,-141.68
  rectangle net NetC4_2: -45.02,-129.45 -16.94,-107.72
  region net GND: 894.55,-97.54 859.97,-62.96 848.55,-74.38 883.13,-108.96
  pour cut-out: -381.39,-246.5 -251.5,-246.5 -248.5,-249.5 -249.5,-250.5 -249.5,-403.5 -252.5,-406.5 -383.5,-405.5 -381.5,-396.5 -381.5,-248.33
  pour cut-out: 1260,-258 1151,-258 1103.3,-305.7 1100.45,-466.09 1118.62,-524.88 1260,-524.88
  pour cut-out: 937,0 863,-74 1095,-306 1109,-306 1179,-236 943,0
  pour cut-out: 1051.33,-335.39 1051.16,-335.57 1051.16,-410.67 1061.93,-410.67 1063.33,-412.08 1063.33,-489.28 1139.84,-489.28 1140.19,-489.63 1158.57,-489.63 1161.89,-486.31 1161.89,-391.42 1105.78,-335.3 1051.16,-335.3
  pour cut-out: -262,-142 -262,-247 -250,-247 -249.08,-246.08 -249.08,-142.74 -261.19,-142.74 -261.94,-142
  pour cut-out: 1089.48,-489.56 1089.48,-544.14 1133.79,-544.14 1145.98,-556.33 1145.98,-581.57 1234.15,-575.96 1246.71,-566.6 1258.68,-491.03 1090.95,-491.03
  pour cut-out: 871.12,-1.99 871.12,-58.77 889.96,-58.77 889.96,-2.38 889.56,-1.99

## Silkscreen, mask and mechanical layers (free items; w line width, h text height)
Top Overlay:
  lines w5: -386.26,-388.19 ccw(c-332.22,-330.92) -382.29,-270.16 ; 443.3,-294.34 443.3,-223.47 ; 640.15,-294.34 640.15,-223.47 ; 1260.44,-375.21 cw(c1195.34,-330.92) 1260.44,-286.63
  text "GND" at 30.02,-30.46 h20
  text "AG" at 874.28,-91.82 h20 r135
  text "RX" at 403.81,-121.73 h15
  text "+5V" at 169,-123 h20
  text "TX" at 326.32,-122.72 h15
  text "ANA" at 915.5,-131.61 h20 r135
  text "NPN" at 999.82,-211.67 h20 r135
  text "+12V" at -298.86,-226.31 h20
  text "GND" at 65.66,-251.88 h20
  text "GND" at 672.18,-267.23 h15 r90
  text "+24V" at 1061.3,-274.07 h20 r135
  text "+5V" at 434,-287 h15 r90
  text "GND" at 1102.58,-314.19 h20 r135
  text "GND" at -292.41,-418.72 h15.75
  text "+3.3V" at 1.86,-483.14 h16
  text "+3.3V" at -263.23,-487.64 h15.75 r90
  text "TX" at -11.95,-702.41 h20
  text "+12.8V" at 615.39,-707.93 h20
  text "RX" at -339.89,-718.57 h20
  text "+5V" at 354.32,-724.55 h15
Bottom Overlay:
  lines w5: -180.64,-669 -180.64,-365 917.08,-365 ; 917.09,-727.04 917.09,-365.49
  text "OSM41-TOF5XXX-MAIN-GP8-A0" at 582.61,-578.37 h20
  text "2023-10-27" at 581.77,-620.62 h20
Mechanical 1:
  lines w5: 1195.3,-389.76 cw(c1195.3,-330.71) 1195.3,-271.65